# Altium PCB Demo Board - PCB.PcbDoc
Units mm, origin at the board's own origin, x right, y up, seen from the top; angles counter-clockwise.
Board outline 90 x 62.5 mm, 4 copper layers (Top Layer, Int1 (GND), Int2 (PWR), Bottom Layer), stack 1.57 mm thick; 106 components, 52 nets, 294 pads, 71 vias.
Unrouted connection lines stored in the file: 1.
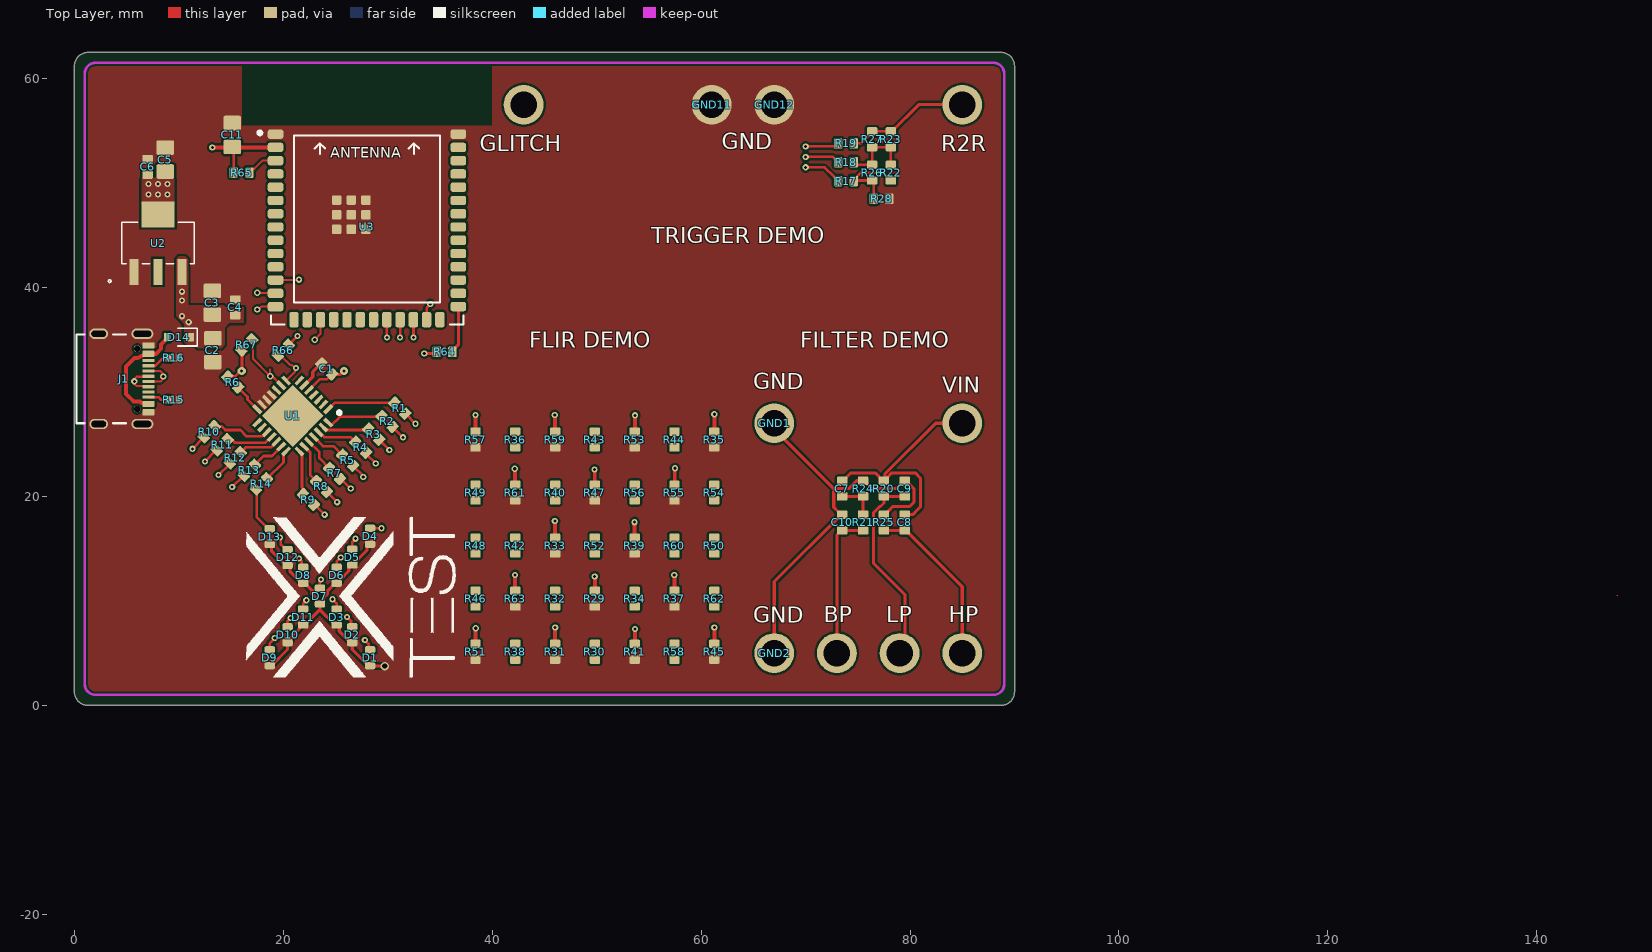
[diagram p0: Top Layer view]
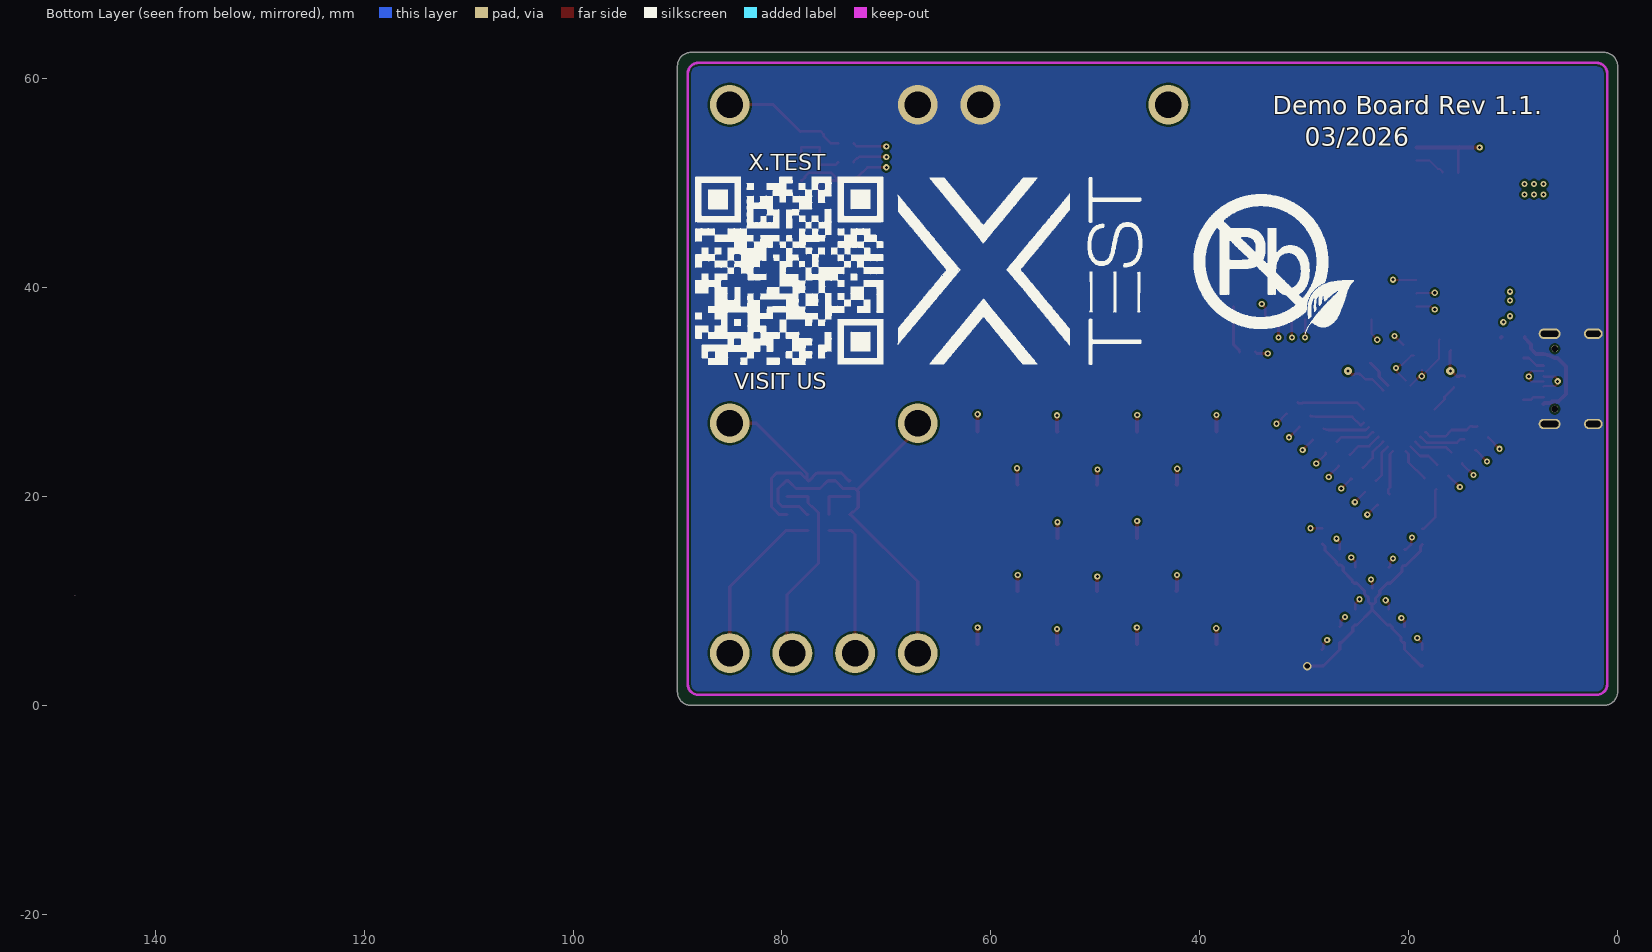
[diagram p1: Bottom Layer view, seen from below]
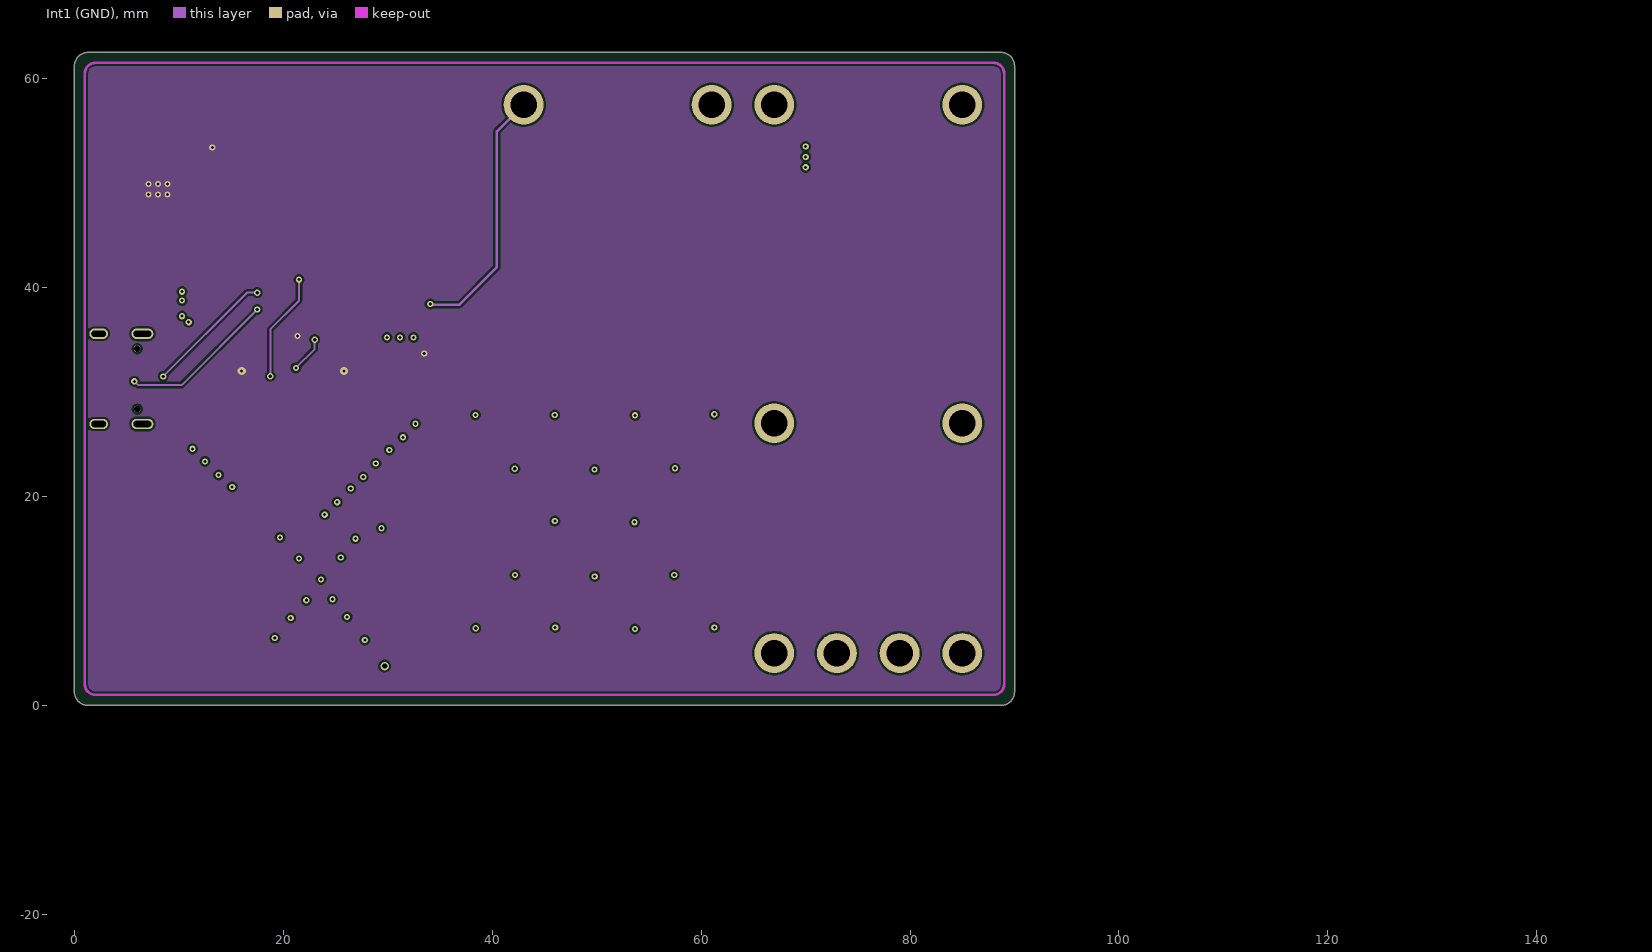
[diagram p2: Int1 (GND)]
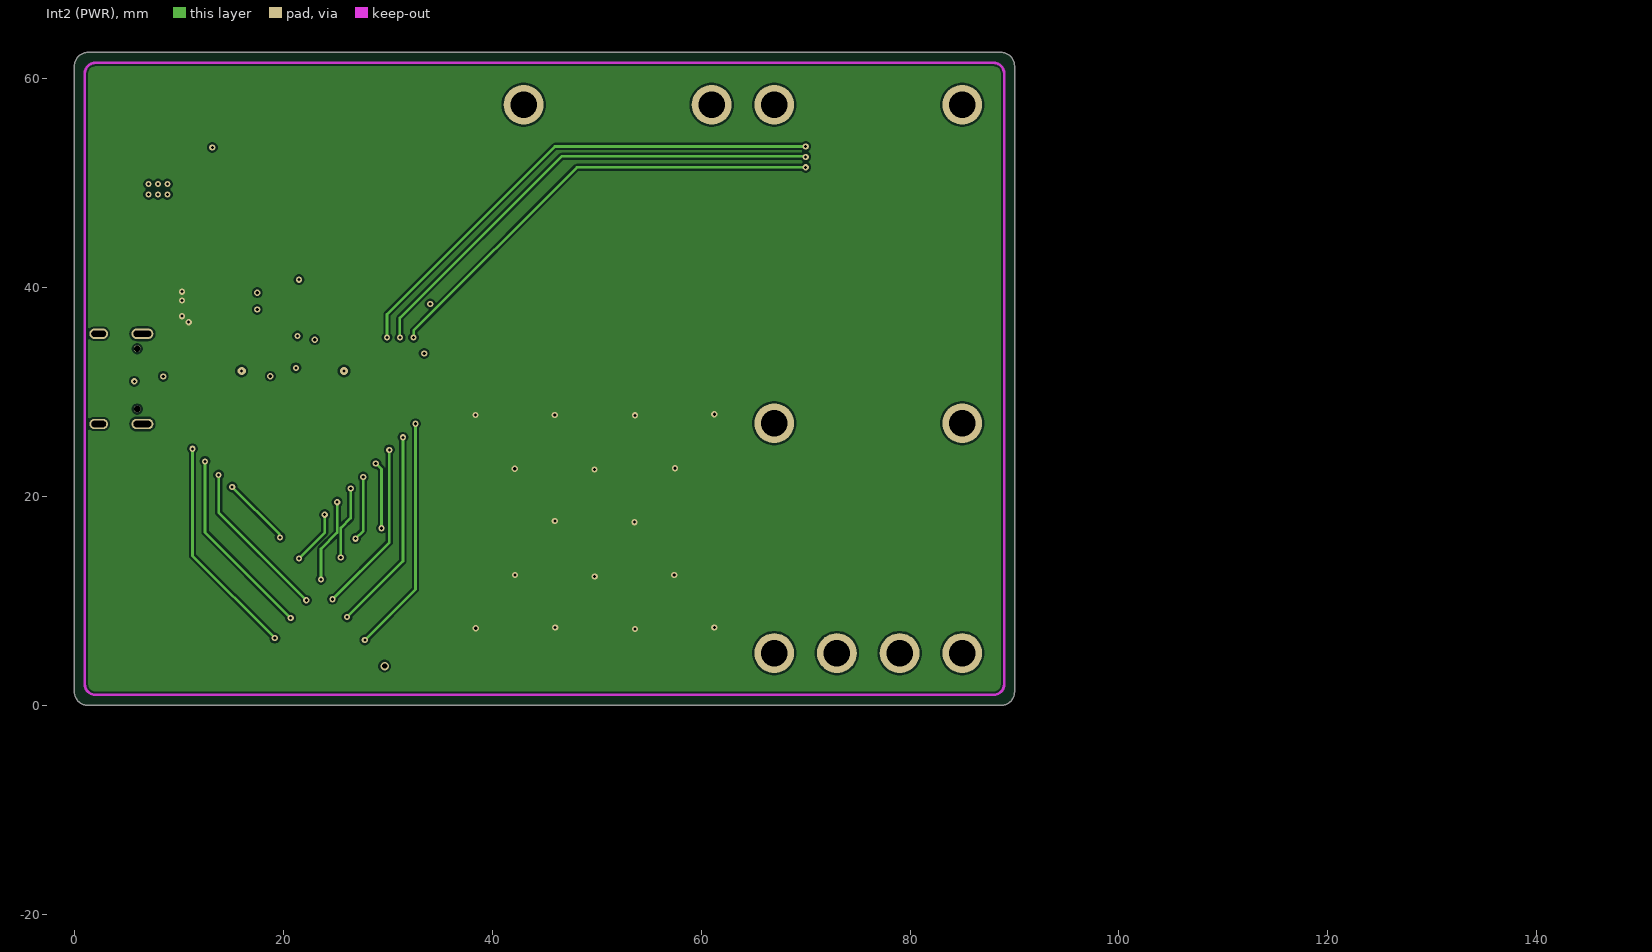
[diagram p3: Int2 (PWR)]
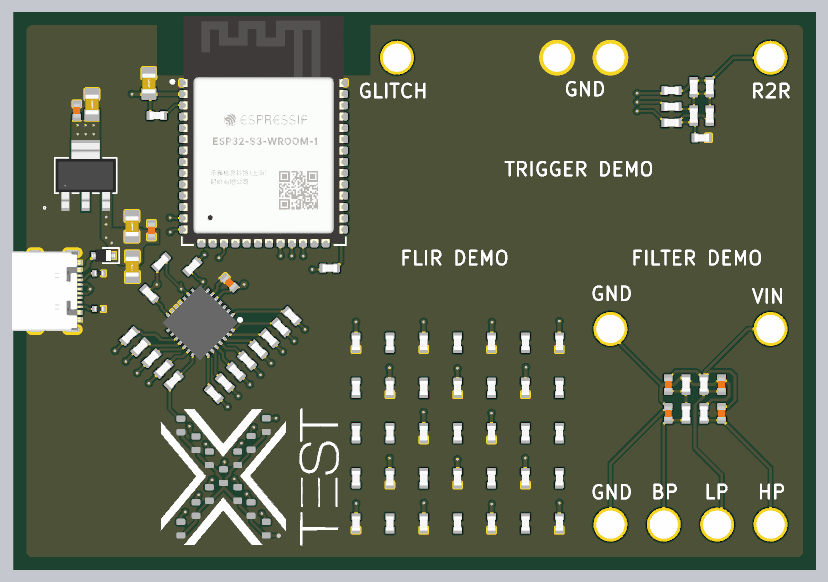
[diagram p4: 3D render of the assembled board from above, using the file's embedded part models]

## Layer stack, top to bottom
Top Solder: solder mask 0.0254, SM-001, Dk 4
Top Layer: signal copper 0.035
Dielectric 1: prepreg 0.2, PP-017, Dk 4.6
Int1 (GND): signal copper 0.0175
Dielectric 3: core 1.065, Core-039, Dk 4.6
Int2 (PWR): signal copper 0.0175
Dielectric 5: prepreg 0.2, PP-017, Dk 4.6
Bottom Layer: signal copper 0.035
Bottom Solder: solder mask 0.0254, SM-001, Dk 4

## Board outline
0,1.27 0,61.23 cw(c1.27,61.23) 1.27,62.5 88.73,62.5 cw(c88.73,61.23) 90,61.23 90,1.27 cw(c88.73,1.27) 88.73,0 1.27,0 cw(c1.27,1.27)

## Design rules (kind name [scope] priority, off if disabled: settings)
BoardOutlineClearance [All] p1: gap=0.3 ignorepadtopadclearanceinfootprint=FALSE except(0.4: Arc-SplitBarrior Arc-SplitContinuation Track-SplitBarrior Track-SplitContinuation SMDPad-SplitBarrior SMDPad-SplitContinuation THPad-SplitBarrior THPad-SplitContinuation Via-SplitBarrior Via-SplitContinuation Fill-SplitBarrior Fill-SplitContinuation Poly-SplitBarrior Poly-SplitContinuation Region-SplitBarrior Region-SplitContinuation Text-SplitBarrior Text-SplitContinuation)
Clearance "Clearance Different Nets" [All] p1: gap=0.2 ignorepadtopadclearanceinfootprint=TRUE except(0.089: Arc-Arc Arc-Track Arc-SMDPad Track-Track Track-SMDPad; 0.127: SMDPad-SMDPad SMDPad-Via THPad-Via Via-Via; 0.254: Arc-Via Arc-Text Track-Via Track-Text SMDPad-Text THPad-Text Via-Text Fill-Text Poly-Text Region-Text Text-Text; 0.5: THPad-THPad Via-Hole)
Clearance "Clearance Same Nets" [All] p2: gap=0.2 ignorepadtopadclearanceinfootprint=FALSE except(0.089: Arc-Arc Arc-Track Track-Track SMDPad-SMDPad; 0.1: Arc-SMDPad Track-SMDPad; 0.127: SMDPad-Via THPad-Via; 0.254: Arc-Text Track-Text SMDPad-Text THPad-Text Via-Via Via-Text Fill-Text Poly-Text Region-Text Text-Text)
Clearance "Clearance Bottom Layer" [OnLayer('Bottom Layer')] p3: gap=0.203 ignorepadtopadclearanceinfootprint=TRUE except(0.254: Arc-Text Track-Text SMDPad-Text THPad-Text Via-Text Fill-Text Poly-Text Region-Text Text-Text)
Clearance "Clearance Top Layer" [OnLayer('Top Layer')] p4: gap=0.2 ignorepadtopadclearanceinfootprint=TRUE except(0: SMDPad-Via; 0.254: Text-Text)
HoleSize [All] p1: absolutevalues=TRUE maxlimit=6.3 minlimit=0.2 maxpercent=80.000 minpercent=20.000
MinimumAnnularRing [All] p1: minimumring=0.13
MinimumSolderMaskSliver [All] p1: minsoldermaskwidth=0.1
PolygonConnect PolygonConnect_1 [All] p1: connectstyle=Direct reliefconductorwidth=0.508 reliefentries=4 polygonreliefangle="90 Angle" airgapwidth=0.254
RoutingCorners [All] p1: cornerstyle=Round minsetback=2.54 maxsetback=2.54
RoutingVias [All] p1: holewidth=0.5 width=1 viastyle="Through Hole" minholewidth=0.2 minwidth=0.35 maxholewidth=1 maxwidth=2
SilkToSilkClearance [All] p1: silktosilkclearance=0.1
SilkToSolderMaskClearance [IsPad] p1: minsilkscreentomaskgap=0.1 clearancetoexposedcopper=TRUE
SolderMaskExpansion [All] p1: expansion=0.102 istentingtop=FALSE
Width [All] p1: maxlimit=2.54 minlimit=0.089 preferedwidth=0.3 minimp=50.000000 maximp=50.000000 favimp=50.000000
25 further rules are at their usual default settings.

## Classes and differential pairs
component class "Demo Board 4 - Schematic": C11 R64 R65 R66 R67 U3
component class "Demo Board 3 - Schematic": BP C7 C8 C9 C10 GLITCH GND1 GND2 GND11 GND12 HP LP R2R R17 R18 R19 R20 R21 R22 R23 R24 R25 R26 R27 R28 R29 R30 R31 R32 R33 R34 R35 R36 R37 R38 R39 R40 R41 R42 R43 R44 R45 R46 R47 R48 R49 R50 R51 R52 R53 R54 R55 R56 R57 R58 R59 R60 R61 R62 R63 VIN
component class "Demo Board 1 - Schematic": C2 C3 C4 C5 C6 D14 J1 R15 R16 U2
component class "Demo Board 2- Schematic": C1 D1 D2 D3 D4 D5 D6 D7 D8 D9 D10 D11 D12 D13 R1 R2 R3 R4 R5 R6 R7 R8 R9 R10 R11 R12 R13 R14 U1

## Components (designator, comment, footprint, x,y, rotation, side; value= is the part's Value field where it differs from the comment)
BP "1502-4" KEYSTONE_1502-4 73,5 r270 top (schematic designator TP2)
C1 "100nF" CAP_0603 24.15,32.2 r315 top
C2 "10µF" CAP_0805 13.25,34 r90 top
C3 "10µF" CAP_0805 13.2,38.543 r270 top
C4 "100nF" CAP_0603 15.4,38.1 r270 top
C5 "10µF" CAP_0805 8.7,52.243 r270 top
C6 "100nF" CAP_0603 7,51.55 r270 top
C7 "100nF" CAP_0603 73.5,20.75 r90 top
C8 "1nF" CAP_0603 79.5,17.5 r90 top
C9 "10nF" CAP_0603 79.5,20.75 r270 top
C10 "10nF" CAP_0603 73.5,17.5 r90 top
C11 "10µF" CAP_0805 15.1,54.6 r270 top
D1 "SML-310VTT86" LED_SML-310_ROM 28.3,4.552 r90 top
D2 "SML-310VTT86" LED_SML-310_ROM 26.6,6.752 r90 top
D3 "SML-310VTT86" LED_SML-310_ROM 25.1,8.452 r90 top
D4 "SML-310VTT86" LED_SML-310_ROM 28.3,16.19 r90 top
D5 "SML-310VTT86" LED_SML-310_ROM 26.6,14.19 r90 top
D6 "SML-310VTT86" LED_SML-310_ROM 25.1,12.452 r90 top
D7 "SML-310VTT86" LED_SML-310_ROM 23.5,10.452 r90 top
D8 "SML-310VTT86" LED_SML-310_ROM 21.9,12.452 r90 top
D9 "SML-310VTT86" LED_SML-310_ROM 18.7,4.552 r90 top
D10 "SML-310VTT86" LED_SML-310_ROM 20.4,6.752 r90 top
D11 "SML-310VTT86" LED_SML-310_ROM 21.9,8.452 r90 top
D12 "SML-310VTT86" LED_SML-310_ROM 20.4,14.152 r90 top
D13 "SML-310VTT86" LED_SML-310_ROM 18.7,16.152 r90 top
D14 "MS2A40LWS" SOD-323 10,35.25 r0 top
GLITCH "1502-4" KEYSTONE_1502-4 43,57.5 r0 top
GND1 "1502-4" KEYSTONE_1502-4 67,27 r270 top
GND2 "1502-4" KEYSTONE_1502-4 67,5 r270 top
GND11 "1502-4" KEYSTONE_1502-4 61,57.5 r0 top
GND12 "1502-4" KEYSTONE_1502-4 67,57.5 r0 top
HP "1502-4" KEYSTONE_1502-4 85,5 r270 top (schematic designator TP3)
J1 "USB4105-GF-A-060" USB4105-GF-A-060 4.7,31.25 r270 top
LP "1502-4" KEYSTONE_1502-4 79,5 r270 top (schematic designator TP1)
R1 "1k" RES_0603 31.15,28.45 r315 top
R2 "1k" RES_0603 29.93,27.17 r315 top
R2R "1502-4" KEYSTONE_1502-4 85,57.5 r0 top
R3 "1k" RES_0603 28.65,25.95 r315 top
R4 "1k" RES_0603 27.4,24.7 r315 top
R5 "1k" RES_0603 26.15,23.45 r315 top
R6 "10k" RES_0603 15.15,30.95 r315 top
R7 "1k" RES_0603 24.9,22.2 r315 top
R8 "1k" RES_0603 23.65,20.95 r315 top
R9 "1k" RES_0603 22.4,19.7 r315 top
R10 "1k" RES_0603 12.9,26.2 r225 top
R11 "1k" RES_0603 14.15,24.95 r225 top
R12 "1k" RES_0603 15.4,23.7 r225 top
R13 "1k" RES_0603 16.75,22.5 r225 top
R14 "1k" RES_0603 17.9,21.2 r225 top
R15 "5k1" RES_0402 9.5,29.25 r180 top
R16 "5k1" RES_0402 9.5,33.25 r180 top
R17 "10k" RES_0603 73.866,50.189 r180 top
R18 "10k" RES_0603 73.866,51.989 r180 top
R19 "10k" RES_0603 73.866,53.789 r180 top
R20 "5k6" RES_0603 77.5,20.75 r90 top
R21 "3k3" RES_0603 75.5,17.5 r270 top
R22 "10k" RES_0603 78.166,50.989 r270 top
R23 "10k" RES_0603 78.166,54.189 r270 top
R24 "1k6" RES_0603 75.5,20.75 r90 top
R25 "8k2" RES_0603 77.5,17.5 r90 top
R26 "10k" RES_0603 76.366,50.989 r270 top
R27 "10k" RES_0603 76.366,54.189 r270 top
R28 "10k" RES_0603 77.266,48.489 r180 top
R29 "820R" RES_0603 49.825,10.205 r90 top
R30 "820R" RES_0603 49.825,5.125 r90 top
R31 "820R" RES_0603 46.015,5.125 r90 top
R32 "820R" RES_0603 46.015,10.205 r90 top
R33 "820R" RES_0603 46.015,15.285 r90 top
R34 "820R" RES_0603 53.635,10.205 r90 top
R35 "820R" RES_0603 61.255,25.445 r90 top
R36 "820R" RES_0603 42.205,25.445 r90 top
R37 "820R" RES_0603 57.445,10.205 r90 top
R38 "820R" RES_0603 42.205,5.125 r90 top
R39 "820R" RES_0603 53.635,15.285 r90 top
R40 "820R" RES_0603 46.015,20.365 r90 top
R41 "820R" RES_0603 53.635,5.125 r90 top
R42 "820R" RES_0603 42.205,15.285 r90 top
R43 "820R" RES_0603 49.825,25.445 r90 top
R44 "820R" RES_0603 57.445,25.445 r90 top
R45 "820R" RES_0603 61.255,5.125 r90 top
R46 "820R" RES_0603 38.395,10.205 r90 top
R47 "820R" RES_0603 49.825,20.365 r90 top
R48 "820R" RES_0603 38.395,15.285 r90 top
R49 "820R" RES_0603 38.395,20.365 r90 top
R50 "820R" RES_0603 61.255,15.285 r90 top
R51 "820R" RES_0603 38.395,5.125 r90 top
R52 "820R" RES_0603 49.825,15.285 r90 top
R53 "820R" RES_0603 53.635,25.445 r90 top
R54 "820R" RES_0603 61.255,20.365 r90 top
R55 "820R" RES_0603 57.445,20.365 r90 top
R56 "820R" RES_0603 53.635,20.365 r90 top
R57 "820R" RES_0603 38.395,25.445 r90 top
R58 "820R" RES_0603 57.445,5.125 r90 top
R59 "820R" RES_0603 46.015,25.445 r90 top
R60 "820R" RES_0603 57.445,15.285 r90 top
R61 "820R" RES_0603 42.205,20.365 r90 top
R62 "820R" RES_0603 61.255,10.205 r90 top
R63 "820R" RES_0603 42.205,10.205 r90 top
R64 "10k" RES_0603 35.433,33.833 r180 top
R65 "10k" RES_0603 16,51 r180 top
R66 "4k7" RES_0603 20,34 r45 top
R67 "4k7" RES_0603 16.5,34.5 r225 top
U1 "MCP23017" QFN65P600X600X100-29N-D 20.9,27.7 r225 top
U2 "AMS1117-3.3" SOT_AMS_ADS 8,44.25 r0 top
U3 "ESP32-S3-WROOM-1-N8R4" ESP32-S3-WROOM-1 28,45.8 r0 top
VIN "1502-4" KEYSTONE_1502-4 85,27 r270 top (schematic designator TP5)

## Footprints (in the part's own frame and the unit in brackets; to place one, negate y for a bottom-side part, rotate by r counter-clockwise, add the part's x,y. Pads: shape width x height; smd on the part's side, far side on the other; paste and mask are expansions set on the pad)
CAP_0603 [mm]
  rrect25% 0.8x1 smd: 1(-0.75,0) 2(0.75,0)
  body extent -0.8,-0.4 0.8,0.4, height 0.51
CAP_0805 [mm]
  rrect25% 1.4x1.7 smd: 1(-1.143,0) 2(1.143,0)
  body extent -1.15,-0.76 1.15,0.79, height 1.01
ESP32-S3-WROOM-1 [mm]
  rrect50% 1.5x0.9 smd: 1(-8.75,8.88) 2(-8.75,7.61) 3(-8.75,6.34) 4(-8.75,5.07) 5(-8.75,3.8) 6(-8.75,2.53) 7(-8.75,1.26) 8(-8.75,-0.01) 9(-8.75,-1.28) 10(-8.75,-2.55) 11(-8.75,-3.82) 12(-8.75,-5.09) 13(-8.75,-6.36) 14(-8.75,-7.63) 27(8.75,-7.63) 28(8.75,-6.36) 29(8.75,-5.09) 30(8.75,-3.82) 31(8.75,-2.55) 32(8.75,-1.28) 33(8.75,-0.01) 34(8.75,1.26) 35(8.75,2.53) 36(8.75,3.8) 37(8.75,5.07) 38(8.75,6.34) 39(8.75,7.61) 40(8.75,8.88)
  rrect50% 0.9x1.5 smd: 15(-6.985,-8.88) 16(-5.715,-8.88) 17(-4.445,-8.88) 18(-3.175,-8.88) 19(-1.905,-8.88) 20(-0.635,-8.88) 21(0.635,-8.88) 22(1.905,-8.88) 23(3.175,-8.88) 24(4.445,-8.88) 25(5.715,-8.88) 26(6.985,-8.88)
  rrect25% 0.9x0.9 smd: EP(-2.9,-0.235) EP(-2.9,1.165) EP(-2.9,2.565) EP(-1.5,-0.235) EP(-1.5,1.165) EP(-1.5,2.565) EP(-0.1,-0.235) EP(-0.1,1.165) EP(-0.1,2.565)
  silkscreen extent -10.4,-9.36 9.25,9.15, body extent -9.01,-9.14 9.01,16.37, height 3.18
KEYSTONE_1502-4 [mm]
  round 3.81 hole 2.54: 1(0,0)
  body extent -1.59,-1.59 1.59,1.59, height 9.93
LED_SML-310_ROM [mm]
  rrect50% 0.7x1 smd paste+0 mask+0: 1(-0.762,0) 2(0.762,0)
QFN65P600X600X100-29N-D [mm]
  rect 1.05x0.35 smd: 1(-2.85,1.95) 2(-2.85,1.3) 3(-2.85,0.65) 4(-2.85,0) 5(-2.85,-0.65) 6(-2.85,-1.3) 7(-2.85,-1.95) 15(2.85,-1.95) 16(2.85,-1.3) 17(2.85,-0.65) 18(2.85,0) 19(2.85,0.65) 20(2.85,1.3) 21(2.85,1.95)
  rect 0.35x1.05 smd: 8(-1.95,-2.85) 9(-1.3,-2.85) 10(-0.65,-2.85) 11(0,-2.85) 12(0.65,-2.85) 13(1.3,-2.85) 14(1.95,-2.85) 22(1.95,2.85) 23(1.3,2.85) 24(0.65,2.85) 25(0,2.85) 26(-0.65,2.85) 27(-1.3,2.85) 28(-1.95,2.85)
  rect 4.2x4.2 smd: 29(0,0)
  silkscreen extent -3.54,2.76 -3.21,3.09, body extent -3.05,-3.05 3.05,3.05, height 1
RES_0402 [mm]
  rrect25% 0.6x0.7 smd: 1(-0.5,0) 2(0.5,0)
  body extent -0.5,-0.25 0.5,0.25, height 0.3
RES_0603 [mm]
  rrect25% 0.8x1 smd: 1(-0.75,0) 2(0.75,0)
  body extent -0.8,-0.43 0.8,0.43, height 0.52
SOD-323 [mm]
  rrect25% 0.63x0.83 smd: A(-1.115,0) K(1.115,0)
  silkscreen extent -0.1,-0.85 1.75,0.85, body extent -1.3,-0.68 1.3,0.68, height 1.1
SOT_AMS_ADS [mil]
  rect 35x98 smd paste+0 mask+0: 1(-90.16,-108.5) 2(0,-108.5) 3(90.16,-108.5)
  rect 126x98 smd paste+0 mask+0: 4(0,108.5)
  silkscreen extent -187,-148 137,78, body extent -132,-144 132,144, height 71
USB4105-GF-A-060 [mm]
  rrect25% 0.6x1.15 smd mask+0.05: A1B12(-3.2,2.378) A4B9(-2.4,2.378) B1A12(3.2,2.378) B4A9(2.4,2.378)
  rrect25% 0.3x1.15 smd mask+0.05: A5(-1.25,2.378) A6(-0.25,2.378) A7(0.25,2.378) A8(1.25,2.378) B5(1.75,2.378) B6(0.75,2.378) B7(-0.75,2.378) B8(-1.75,2.378)
  round 0.65 hole 0.65 unplated mask+0.05: MH(-2.89,1.303) MH(2.89,1.303)
  oval 1x2.1 hole 0.6 slot 1.7 at 90 deg: SH(-4.32,1.803) SH(4.32,1.803)
  oval 1x1.8 hole 0.6 slot 1.4 at 90 deg: SH(-4.32,-2.377) SH(4.32,-2.377)
  silkscreen extent -4.25,-4.5 4.25,0.25, body extent -4.47,-4.97 4.47,2.73, height 3.27

## Part data
BP GLITCH GND1 GND2 GND11 GND12 HP LP R2R VIN: Package=None, Availability=Unavailable, MP=1502-4, Price=None
C1 C4 C6 C7 C8 C9 C10: library part CAP_0603, "Capacitor SMD 0603"
C2 C3 C5 C11: library part CAP_0805, "Capacitor SMD 0805"
D1 D2 D3 D4 D5 D6 D7 D8 D9 D10 D11 D12 D13: "Description", Manufacturer_Name="ROHM Semiconductor", Copyright="Copyright (C) 2025 Ultra Librarian. All rights reserved.", Manufacturer_Part_Number=SML-310VTT86
D14: library part D_SCHOTTKY_SOD_323, "Diode Schottky SMD SOD-323, MS2A40LWS"
J1: "USB Connector Type C SMT 12 Pin", Manufacturer=GCT, Distributor Link=https://eu.mouser.com/ProductDetail/GCT/USB4105-GF-A-060?qs=QNEnbhJQKvY2mocwNJzgfA%3D%3D, Manufacturer Part Number=USB4105-GF-A-060
R1 R2 R3 R4 R5 R6 R7 R8 R9 R10 R11 R12 R13 R14 R17 R18 R19 R20 R21 R22 R23 R24 R25 R26 R27 R28 R29 R30 R31 R32 R33 R34 R35 R36 R37 R38 R39 R40 R41 R42 R43 R44 R45 R46 R47 R48 R49 R50 R51 R52 R53 R54 R55 R56 R57 R58 R59 R60 R61 R62 R63 R64 R65 R66 R67: library part RES_0603, "Resistor SMD 0603"
R15 R16: library part RES_0402, "Resistor SMD 0402"
U1: library part MCP23017-E_ML, "Integrated Circuit", Arrow Part Number=MCP23017-E/ML, Manufacturer_Name=Microchip, Mouser Part Number=579-MCP23017-E/ML, Arrow Price/Stock=https://www.arrow.com/en/products/mcp23017-eml/microchip-technology?utm_currency=USD&region=nac, Datasheet Link=https://datasheet.datasheetarchive.com/originals/distributors/SFDatasheet-4/sf-00090057.pdf, Height=1mm, Manufacturer_Part_Number=MCP23017-E/ML, Mouser Price/Stock=https://www.mouser.co.uk/ProductDetail/Microchip-Technology/MCP23017-E-ML?qs=usxtMOJb1RwOdfCNDE63wQ%3D%3D
U2: "Description", Manufacturer_Name="Advanced Monolithic Systems", Copyright="Copyright (C) 2025 Ultra Librarian. All rights reserved.", Manufacturer_Part_Number=AMS1117-3.3, RefDes=RefDes, Type=Type
U3: library part ESP32-S3-WROOM-1-N4, "2.4 GHz Wi-Fi (802.11 b/g/n) and Bluetooth 5 (LE) Module ESP32-S3, 4MB Flash, on-board PCB antenna)", Manufacturer=Espressif, Distributor Link=https://www.mouser.de/ProductDetail/Espressif-Systems/ESP32-S3-WROOM-1-N4?qs=Li%252BoUPsLEnsO%2FkiJOUK0FQ%3D%3D, Manufacturer Part Number=ESP32-S3-WROOM-1-N4

## Via types
v1: diameter 0.6, hole 0.3, Top Layer to Bottom Layer, tented top, 68 vias
v2: diameter 0.8, hole 0.3, Top Layer to Bottom Layer, tented top, 2 vias
v3: diameter 0.8, hole 0.5, Top Layer to Bottom Layer, tented top, 1 vias

## Nets (pads, with @x,y where several pads share a name; then routed paths per layer and width w, separated by ;. In a path a pad name is that pad's centre, name@x,y a point inside that pad or via, vN(x,y) a via of type N, cw(c..) or ccw(c..) an arc to the next point about the centre after c; other vN are vias at no path point)
3V3: C1.2 C5.2 C6.2 C11.2 R6.1 R64.2 R65.2 R66.2 R67.2 U1.5 U2.4 U3.2 | length 18.8
  Top Layer w0.25: R6.1 14.69,31.551 15.079,31.551 15.15,31.48 15.38,31.48 15.9,32 v2(16,32) ; C11.2@15.043,53.4 15.25,53.193 R65.2 ; R67.2 16.04,33.899 v2@16.04,32.04 ; R66.2 20.532,34.53 v1(21.355,35.353) ; U1.5 23.476,31.195 24.145,31.195 24.62,31.67 C1.2 24.751,31.74 25.14,31.74 25.211,31.67 25.436,31.67 25.797,32.031 v2@25.831,32.031 ; v1(33.484,33.684) 34.534,33.684 R64.2
  Top Layer w0.4: v1(13.2,53.4) 15.043,53.4 C11.2 15.147,53.41 U3.2
  other v1: 7.1,48.9 8,48.9 8.9,48.9 7.1,49.9 8,49.9 8.9,49.9
  other v2: 25.811,32
5V: C2.2 C3.2 C4.2 D14.K R29.2 R31.2 R33.2 R35.2 R37.2 R39.2 R41.2 R45.2 R47.2 R51.2 R53.2 R55.2 R57.2 R59.2 R61.2 R63.2 U2.3 | length 24.8
  Top Layer w0.38: D14.K D14.K@11.168,35.197
  Top Layer w0.381: v1(38.39,27.797) 38.392,27.794 38.392,26.198 R57.2 ; R51.2 38.406,5.886 38.406,7.37 v1(38.416,7.381) ; v1(42.157,22.65) 42.181,22.627 42.181,21.139 R61.2 ; v1(42.181,12.467) 42.193,12.455 42.193,10.967 R63.2 ; v1(45.981,27.79) 45.998,27.773 45.998,26.212 R59.2 ; v1(45.99,17.634) 46.003,17.621 46.003,16.047 R33.2 ; R31.2 46.019,5.879 46.019,7.436 v1(46.023,7.44) ; v1(49.796,22.565) 49.811,22.551 49.811,21.129 R47.2 ; v1(49.805,12.338) 49.815,12.328 49.815,10.965 R29.2 ; v1(53.622,17.53) 53.629,17.524 53.629,16.041 R39.2 ; R41.2 53.648,5.888 53.648,7.291 v1(53.66,7.303) ; R53.2 53.654,26.214 53.654,27.741 v1(53.673,27.76) ; v1(57.423,12.472) 57.434,12.461 57.434,10.966 R37.2 ; R55.2 57.471,21.141 57.471,22.669 v1(57.496,22.695) ; R45.2 61.259,5.879 61.259,7.435 v1(61.264,7.439) ; R35.2 61.259,26.199 61.259,27.856 v1(61.262,27.859)
  other v1: 10.931,36.68 10.3,37.256 10.3,38.744 10.3,39.6
A_GND: C9.1 C10.2 GND1.1 GND2.1 R24.2 R25.2 | length 41.2
  Top Layer w0.3: GND2.1 67,11.85 73.4,18.25 C10.2 73.25,18.5 73.144,18.5 72.69,18.954 72.69,20.438 72.844,20.592 ; GND1.1 67,26.436 72.844,20.592 ; R25.2 77.6,18.25 77.85,18.5 77.85,18.535 78.345,19.03 79.956,19.03 80.375,19.449 80.375,20.725 79.6,21.5 79.4,21.5 79.15,21.25 79.15,21.241 78.659,20.75 76.35,20.75 75.6,21.5 R24.2 75.498,21.498 74.875,21.498 74.123,20.746 72.997,20.746 72.844,20.592
BP_T: BP.1 C10.1 R21.2 | length 14
  Top Layer w0.3: BP.1 73,16.35 73.4,16.75 C10.1 R21.2
D_N: J1.A7 J1.B7 U3.13 | length 17.6
  Top Layer w0.2: J1.A7 8.25,31 8.5,31.25 v1(8.5,31.485) 8.5,31.72 8.22,32 J1.B7 ; v1(17.5,39.5) 17.53,39.47 19.22,39.47 U3.13
  Int1 (GND) w0.2: v1(8.5,31.485) 16.515,39.5 v1(17.5,39.5)
D_P: J1.A6 J1.B6 U3.14 | length 20.2
  Top Layer w0.2: v1(5.731,31.014) 5.75,30.996 5.75,30.75 5.95,30.55 7.028,30.55 J1.B6 ; v1@5.75,31 5.75,31.25 5.95,31.45 7.028,31.45 J1.A6 ; v1(17.5,37.892) 17.608,37.892 17.886,38.17 U3.14
  Int1 (GND) w0.2: v1(5.731,31.014) 6.092,30.654 6.204,30.654 6.208,30.65 10.258,30.65 v1(17.5,37.892)
EN: R65.1 U3.3 | length 3
  Top Layer w0.2: R65.1 16.75,51.06 17.05,51.36 17.21,51.36 17.99,52.14 U3.3
GND: C1.1 C2.1 C3.1 C4.1 C5.1 C6.1 C11.1 D1.1 D2.1 D3.1 D4.1 D5.1 D6.1 D7.1 D8.1 D9.1 D10.1 D11.1 D12.1 D13.1 GND11.1 GND12.1 J1.A1B12 J1.B1A12 J1.SH R15.1 R16.1 R28.1 R29.1 R31.1 R33.1 R35.1 R37.1 R39.1 R41.1 R45.1 R47.1 R51.1 R53.1 R55.1 R57.1 R59.1 R61.1 R63.1 U1.6 U1.11 U1.12 U1.13 U2.1 U3.1 U3.40 U3.EP | length 36.3
  Top Layer w0.3: D9.1 18.85,3.79 20.4,5.34 D10.1 20.536,5.99 20.735,6.188 20.735,6.524 21.565,7.355 21.565,7.492 21.764,7.69 D11.1 22.05,7.69 23.5,9.14 ; D13.1 18.852,15.237 18.852,14.787 20.25,13.39 D12.1 20.454,13.39 20.652,13.192 20.652,12.787 21.75,11.69 D8.1 22.05,11.69 22.761,10.978 22.761,10.681 23.165,10.277 23.165,9.888 23.364,9.69 D7.1 ; U1.6 22.808,31.446 22.808,31.919 ; 22.873,31.973 C1.1@23.685,32.785 ; D4.1 28.209,15.428 28.011,15.23 28.011,14.839 26.935,13.762 26.935,13.626 26.736,13.428 D5.1 26.464,13.428 26.265,13.23 26.265,12.855 25.435,12.024 25.435,11.888 25.236,11.69 D6.1 24.95,11.69 24.239,10.979 24.239,10.686 23.831,10.279 23.831,9.888 23.633,9.69 D7.1 ; v3(29.7,3.752) 29.681,3.771 28.319,3.771 D1.1 28.15,3.79 26.6,5.34 D2.1 26.45,5.99 25.352,7.087 25.352,7.492 25.154,7.69 D3.1 24.95,7.69 23.5,9.14 ; 23.5,9.14 D7.1
GPIO0: R64.1 U3.27 | length 4.6
  Top Layer w0.3: R64.1 36.183,33.933 36.75,34.5 U3.27
HP_T: C8.1 HP.1 R25.1 | length 16.1
  Top Layer w0.3: R25.1 C8.1 79.6,16.75 85,11.35 HP.1
LSB: R17.2 U3.24 | length 50.1
  Top Layer w0.25: U3.24 32.455,36.91 32.455,35.22 v1(32.465,35.211) ; v1(70,51.5) 71.805,51.5 72.741,50.564 72.841,50.564 73.116,50.289 R17.2
  Int2 (PWR) w0.25: v1(32.465,35.211) 32.465,35.865 48.099,51.5 v1(70,51.5)
MID: R18.2 U3.23 | length 52.3
  Top Layer w0.25: v1@31.175,35.204 U3.23 ; v1(70,52.5) 72.605,52.5 72.741,52.364 72.841,52.364 73.116,52.089 R18.2
  Int2 (PWR) w0.25: v1(31.176,35.204) 31.159,35.22 31.159,37.08 46.636,52.557 69.943,52.557 v1(70,52.5)
MSB: R19.2 U3.22 | length 53.9
  Top Layer w0.25: U3.22 29.914,36.911 29.914,35.226 v1(29.924,35.217) ; v1(70,53.5) 70.007,53.507 72.841,53.507 73.116,53.782 R19.2
  Int2 (PWR) w0.25: v1(29.924,35.217) 29.924,37.424 46,53.5 v1(70,53.5)
NetC7_1: C7.1 R21.1 R24.1 | length 3.8
  Top Layer w0.3: C7.1 R24.1 R21.1
NetD1_2: D1.2 R1.2 | length 25.2
  Top Layer w0.254: v1(27.8,6.252) 28.172,5.88 28.172,5.441 D1.2 ; R1.2 v1(32.65,26.95)
  Int2 (PWR) w0.254: v1(27.8,6.252) 32.65,11.102 v1(32.65,26.95)
NetD2_2: D2.2 R2.2 | length 22
  Top Layer w0.254: v1(26.1,8.452) 26.472,8.08 26.472,7.641 D2.2 ; R2.2 v1(31.45,25.65)
  Int2 (PWR) w0.254: v1(26.1,8.452) 31.45,13.802 v1(31.45,25.65)
NetD3_2: D3.2 R3.2 | length 19
  Top Layer w0.254: v1(24.7,10.152) 25.1,9.752 D3.2 ; R3.2 v1(30.15,24.45)
  Int2 (PWR) w0.254: v1(24.7,10.152) 30.15,15.602 v1(30.15,24.45)
NetD4_2: D4.2 R4.2 | length 8.9
  Top Layer w0.254: R4.2 27.93,24.07 v1(28.85,23.15) ; D4.2 v1(29.4,16.952)
  Int2 (PWR) w0.254: v1(28.85,23.15) 29.4,22.6 29.4,17.1 v1@29.5,17
NetD5_2: D5.2 R5.2 | length 8.8
  Top Layer w0.254: D5.2 26.6,15.652 v1(26.9,15.952) ; R5.2 27.65,21.95 v1(27.65,21.85)
  Int2 (PWR) w0.254: v1(26.9,15.952) 27.65,16.702 v1(27.65,21.85)
NetD6_2: D6.2 R7.2 | length 9.5
  Top Layer w0.254: D6.2 25.1,13.752 v1(25.5,14.152) ; R7.2 25.53,21.67 v1(26.45,20.75)
  Int2 (PWR) w0.254: v1(25.5,14.152) 25.543,14.195 25.5,14.237 25.5,16.976 26.45,17.926 v1(26.45,20.75)
NetD7_2: D7.2 R8.2 | length 10.3
  Top Layer w0.254: D7.2 23.5,11.952 v1(23.6,12.052) ; R8.2 v1(25.15,19.45)
  Int2 (PWR) w0.254: v1(23.6,12.052) 23.6,14.976 25.15,16.526 v1(25.15,19.45)
NetD8_2: D8.2 R9.2 | length 7.6
  Top Layer w0.254: v1(21.5,14.052) 21.772,13.78 21.772,13.342 D8.2 ; R9.2 23.03,19.17 v1(23.95,18.25)
  Int2 (PWR) w0.254: v1(21.5,14.052) 23.95,16.502 v1(23.95,18.25)
NetD9_2: D9.2 R10.2 | length 24.3
  Top Layer w0.254: v1(11.3,24.55) 12.37,25.62 R10.2 ; D9.2 18.7,5.952 v1(19.182,6.433)
  Int2 (PWR) w0.254: v1(11.3,24.55) 11.3,14.315 v1(19.182,6.433)
NetD10_2: D10.2 R11.2 | length 20.9
  Top Layer w0.254: v1(12.5,23.35) 13.57,24.42 R11.2 ; D10.2 20.4,8.052 v1(20.7,8.352)
  Int2 (PWR) w0.254: v1(12.5,23.35) 12.5,16.552 v1(20.7,8.352)
NetD11_2: D11.2 R12.2 | length 18
  Top Layer w0.254: v1(13.8,22.05) 14.87,23.12 R12.2 ; D11.2 21.9,9.752 v1(22.2,10.052)
  Int2 (PWR) w0.254: v1(13.8,22.05) 13.8,18.452 v1(22.2,10.052)
NetD12_2: D12.2 R13.2 | length 9.8
  Top Layer w0.254: v1(15.1,20.9) 16.17,21.97 R13.2 ; v1(19.685,16.074) 19.752,16.007 19.752,15.9 19.766,15.885 19.766,15.397 20.25,14.914 D12.2
  Int2 (PWR) w0.254: v1(15.1,20.9) 19.619,16.381 19.619,16.14 v1(19.685,16.074)
NetD13_2: D13.2 R14.2 | length 4.4
  Top Layer w0.254: R14.2 17.44,20.599 17.44,18.023 18.55,16.914 D13.2
NetJ1_A5: J1.A5 R16.2 | length 2.2
  Top Layer w0.254: J1.A5 7.101,32.523 7.757,32.523 8.484,33.25 R16.2
NetJ1_B5: J1.B5 R15.2 | length 2
  Top Layer w0.254: J1.B5 8.04,29.5 8.29,29.25 R15.2
NetR1_1: R1.1 U1.1 | length 6.6
  Top Layer w0.254: U1.1 24.908,28.95 30.123,28.95 30.163,28.91 30.549,28.91 R1.1
NetR2_1: R2.1 U1.28 | length 5.5
  Top Layer w0.254: U1.28 24.542,26.816 24.609,26.816 25.361,27.567 cw(c25.482,27.446) 25.482,27.618 28.955,27.618 R2.1
NetR3_1: R3.1 U1.27 | length 4.4
  Top Layer w0.254: U1.27 24.082,26.356 24.448,26.356 24.452,26.353 27.72,26.353 R3.1
NetR4_1: R4.1 U1.26 | length 3.9
  Top Layer w0.254: U1.26 23.443,26.144 23.921,25.666 26.434,25.666 R4.1
NetR5_1: R5.1 U1.25 | length 3.4
  Top Layer w0.254: U1.25 23.795,24.805 24.795,24.805 R5.1
NetR6_2: R6.2 U1.14 | length 2.8
  Top Layer w0.254: R6.2 16.566,29.534 16.566,29.276 U1.14
NetR7_1: R7.1 U1.24 | length 3.3
  Top Layer w0.254: U1.24 23.44,24.241 23.44,23.66 R7.1
NetR8_1: R8.1 U1.23 | length 3.8
  Top Layer w0.254: U1.23 22.585,24.176 22.585,22.015 R8.1
NetR9_1: R9.1 U1.22 | length 4.3
  Top Layer w0.254: U1.22 21.784,24.058 21.784,20.844 21.94,20.687 21.94,20.301 R9.1
NetR10_1: R10.1 U1.17 | length 5.6
  Top Layer w0.254: R10.1 13.501,26.66 13.887,26.66 13.946,26.719 14.088,26.719 14.452,26.355 15.881,26.355 16.485,25.75 17.963,25.75 18.357,26.144 U1.17
NetR11_1: R11.1 U1.18 | length 4.6
  Top Layer w0.254: R11.1 15.02,25.48 15.364,25.136 15.37,25.142 18.274,25.142 18.817,25.685 U1.18
NetR12_1: R12.1 U1.19 | length 3.8
  Top Layer w0.254: R12.1 16.401,24.701 18.82,24.701 U1.19
NetR13_1: R13.1 U1.20 | length 3.2
  Top Layer w0.254: R13.1 18.121,23.871 18.909,23.871 U1.20
NetR14_1: R14.1 U1.21 | length 3.3
  Top Layer w0.254: R14.1@18.5,21.75 20.016,23.266 20.016,24.058 U1.21
NetR17_1: R17.1 R22.2 R26.2 R28.2 | length 7.8
  Top Layer w0.25: R17.1 74.616,50.289 75.316,50.989 77.416,50.989 77.791,50.614 77.791,50.514 78.066,50.239 R22.2 ; R17.1@74.666,50.239 R26.2 76.516,50.089 R28.2
NetR18_1: R18.1 R22.1 R23.2 R26.1 R27.2 | length 7.1
  Top Layer w0.25: R18.1 74.866,51.739 R26.1 R27.2 R23.2 R22.1
PWM_GLITCH: GLITCH.1 U3.25 | length 26.1
  Top Layer w0.25: U3.25 33.713,36.922 33.713,38.036 34.058,38.381 v1(34.058,38.419)
  Int1 (GND) w0.25: v1(34.058,38.419) 34.112,38.364 36.864,38.364 40.443,41.943 40.443,54.943 GLITCH.1
R2R: R2R.1 R19.1 R23.1 R27.1 | length 12
  Top Layer w0.25: R19.1 75.289,53.789 76,54.5 76,54.664 76.275,54.939 R27.1 R23.1
  Top Layer w0.3: R23.1 78.266,54.939 80.827,57.5 R2R.1
SCL: R66.1 U1.8 U3.17 | length 9.3
  Top Layer w0.2: R66.1 19.753,33.47 20.645,32.578 20.814,32.578 v1@21.092,32.3 ; U1.8 21.123,31.954 21.123,32.223 v1(21.2,32.3) ; v1(23,35) 23.555,35.555 U3.17
  Int1 (GND) w0.2: v1(21.2,32.3) 23,34.1 v1(23,35)
SDA: R67.1 U1.9 U3.12 | length 18.9
  Top Layer w0.2: R67.1 17.101,34.96 17.101,33.149 v1(18.75,31.5) v1@18.827,31.423 ; 18.727,32.123 18.727,31.712 U1.9 ; U3.12@19.27,40.73 v1@21.48,40.73
  Int1 (GND) w0.2: v1(18.75,31.5) 18.75,35.99 21.5,38.74 v1(21.5,40.75) v1@21.48,40.73
TP_T: C9.2 LP.1 R20.1 | length 18.9
  Top Layer w0.3: LP.1 79.5,5.5 79.5,10.603 76.5,13.603 76.5,18.429 77.096,19.026 77.165,19.026 77.5,19.361 R20.1 C9.2
VBUS: D14.A J1.A4B9 J1.B4A9 | length 10.5
  Top Layer w0.38: J1.B4A9 6.976,28.951 6.422,28.951 6.299,29.075 5.675,29.075 4.931,29.818 4.931,32.438 5.744,33.25 5.985,33.25 6.049,33.25 6.409,33.429 6.693,33.54 J1.A4B9 7.794,33.65 8.277,34.133 8.277,34.542 8.885,35.15 D14.A
VGEN: C7.2 C8.2 R20.2 VIN.1 | length 22.9
  Top Layer w0.3: C7.2 73.6,21.5 74.35,22.25 76.65,22.25 77.4,21.5 R20.2 77.589,21.589 77.589,22.139 82.45,27 VIN.1 ; R20.2@77.786,21.769 77.786,21.786 78.25,22.25 80.5,22.25 81,21.75 81,19 80.75,18.75 80.25,18.25 C8.2
pads on no net: J1.A8 J1.B8 J1.MH R30.1 R30.2 R32.1 R32.2 R34.1 R34.2 R36.1 R36.2 R38.1 R38.2 R40.1 R40.2 R42.1 R42.2 R43.1 R43.2 R44.1 R44.2 R46.1 R46.2 R48.1 R48.2 R49.1 R49.2 R50.1 R50.2 R52.1 R52.2 R54.1 R54.2 R56.1 R56.2 R58.1 R58.2 R60.1 R60.2 R62.1 R62.2 U1.2 U1.3 U1.4 U1.7 U1.10 U1.15 U1.16 U1.29 U2.2 U3.4 U3.5 U3.6 U3.7 U3.8 U3.9 U3.10 U3.11 U3.15 U3.16 U3.18 U3.19 U3.20 U3.21 U3.26 U3.28 U3.29 U3.30 U3.31 U3.32 U3.33 U3.34 U3.35 U3.36 U3.37 U3.38 U3.39

## Polygon pours and split planes (outlines as drawn)
GND on Top Layer "NONET_L01_P-001" (solid, remove dead copper, pour order 9): -5.25,69.25 -4.75,69.75 101.5,69.75 101.5,-1.5 98,-5 -5,-5
5V on Top Layer "NONET_L01_P-001" (solid, pour order 4): 14.393,36.159 14.834,36.6 16.225,36.6 16.225,38.1 14.5,38.1 14.3,38.3 10,38.3 10,37.5 11.341,36.159
3V3 on Top Layer "NONET_L01_P-001" (solid, pour order 3): 6.425,47.895 6.425,50.425 6.5,50.5 9.5,50.5 9.575,50.425 9.575,47.895
5V on Top Layer "NONET_L01_P-001" (solid, remove dead copper, pour order 1): 11.75,36.5 14.052,36.5 14.4,36.152 14.4,34.5 14.1,34.2 11.8,34.2 11.5,34.5
5V on Top Layer "NONET_L01_P-001" (solid, remove dead copper, pour order 0): 10,43 9.75,42.7 9.75,37.25 10.5,36.5 10.5,34.75 10.75,34.5 11.5,34.5 11.75,34.75 11.75,36.5 10.9,37.35 10.9,42.7 10.6,43
3V3 on Int1 (GND) "NONET_L01_P-001" (solid, remove dead copper, pour order 10): -9.5,73 99.75,73 102.5,70.25 102.25,70 102.25,-16 2.25,-16 -8.75,-5
5V on Int2 (PWR) "NONET_L01_P-001" (solid, remove dead copper, pour order 11): -1.75,68.75 1,71.5 104.75,71.5 104.75,-10.75 99,-16.5 88.5,-6 -3.75,-6
GND on Bottom Layer "NONET_L01_P-001" (solid, remove dead copper, pour order 12): -5.75,70 104.5,70 106.75,67.75 100,61 100,-5.75 -4.5,-5.75 -5,-6.25

## Keep-outs
Keep-Out Layer:
  lines w0.254: 1,2 ccw(c2,2) 2,1 88,1 ccw(c88,2) 89,2 89,2.5 89,60.5 ccw(c88,60.5) 88,61.5 2,61.5 ccw(c2,60.5) 1,60.5 1,59.5 1,2.5 1,2

## Other copper
Top Layer:
  region: 147.673,10.5 147.673,10.558 147.731,10.558 147.731,10.5
  region: 7.356,-18.731 7.356,-18.702 7.385,-18.702 7.385,-18.731
  pour cut-out: 16,62.5 16,55.5 40,55.5 40,62.5

## Silkscreen, mask and mechanical layers (free items; w line width, h text height)
Top Overlay:
  drawing of 10 lines, arcs and shapes, not listed
  text "GND" at 61.969,53.238 h1.52
  text "TRIGGER DEMO" at 55.24,44.238 h1.52
  text "FLIR DEMO" at 43.525,34.238 h1.52
  text "FILTER DEMO" at 69.502,34.238 h1.52
  text "GND" at 64.969,30.238 h1.52
  text "GND" at 64.97,7.91 h1.52
Bottom Overlay:
  drawing of 25 lines, arcs and shapes, not listed
  text "Demo Board Rev 1.1. /     03/2026" at 33,53 h3
  text "X.TEST" at 83.19,51.238 h1.52
  text "VISIT US" at 84.586,30.238 h1.52
Kontur:
  lines w0.254: 0,1.27 ccw(c1.27,1.27) 1.27,0 2.5,0 87.5,0 88.73,0 ccw(c88.73,1.27) 90,1.27 90,2.5 90,60 90,61.23 ccw(c88.73,61.23) 88.73,62.5 87.5,62.5 2.5,62.5 1.27,62.5 ccw(c1.27,61.23) 0,61.23 0,57.5 0,2.5 0,1.27

## Dimensions
0,61.23 to 90,60 on Mechanical 16
2.323,26.93 to -7.5,0 on Mechanical 16
-9,62.5 to 2.323,35.57 on Mechanical 16
2.5,62.5 to 2.5,0 on Mechanical 16

## Text inside footprints (layer, text, board x,y; h text height)
U3: Top Overlay "ANTENNA" at 24.468,52.4 h1; Mechanical 13 "ANTENNA / KEEP-OUT" at 20.036,56.191 h2